# Altium PCB DAC_PCB.PcbDoc
Units mil, origin at the board's own origin, x right, y up, seen from the top; angles counter-clockwise.
Board outline 1555 x 2075 mil, 4 copper layers (Top Layer, VDD, GND, Bottom Layer), stack 23.756 mil thick; 35 components, 30 nets, 114 pads, 34 vias.
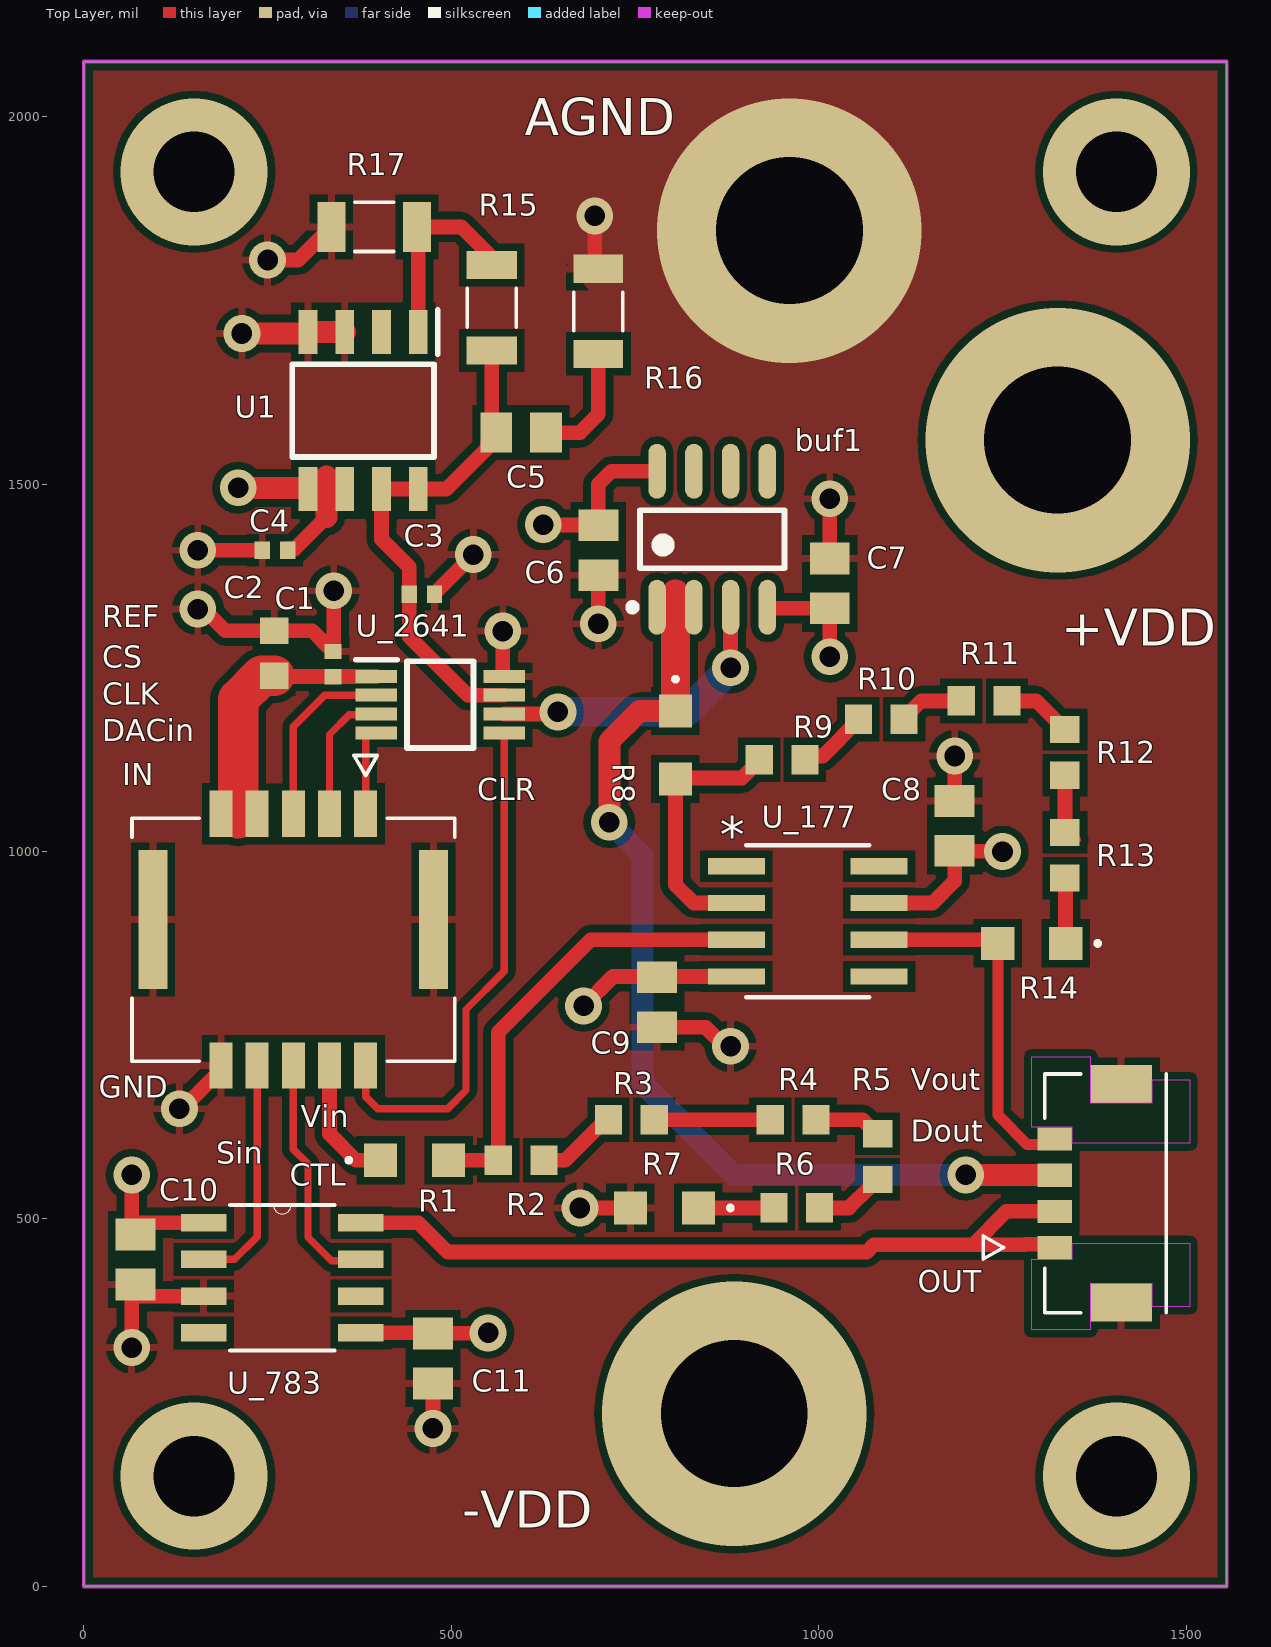
[diagram p0: Top Layer view]
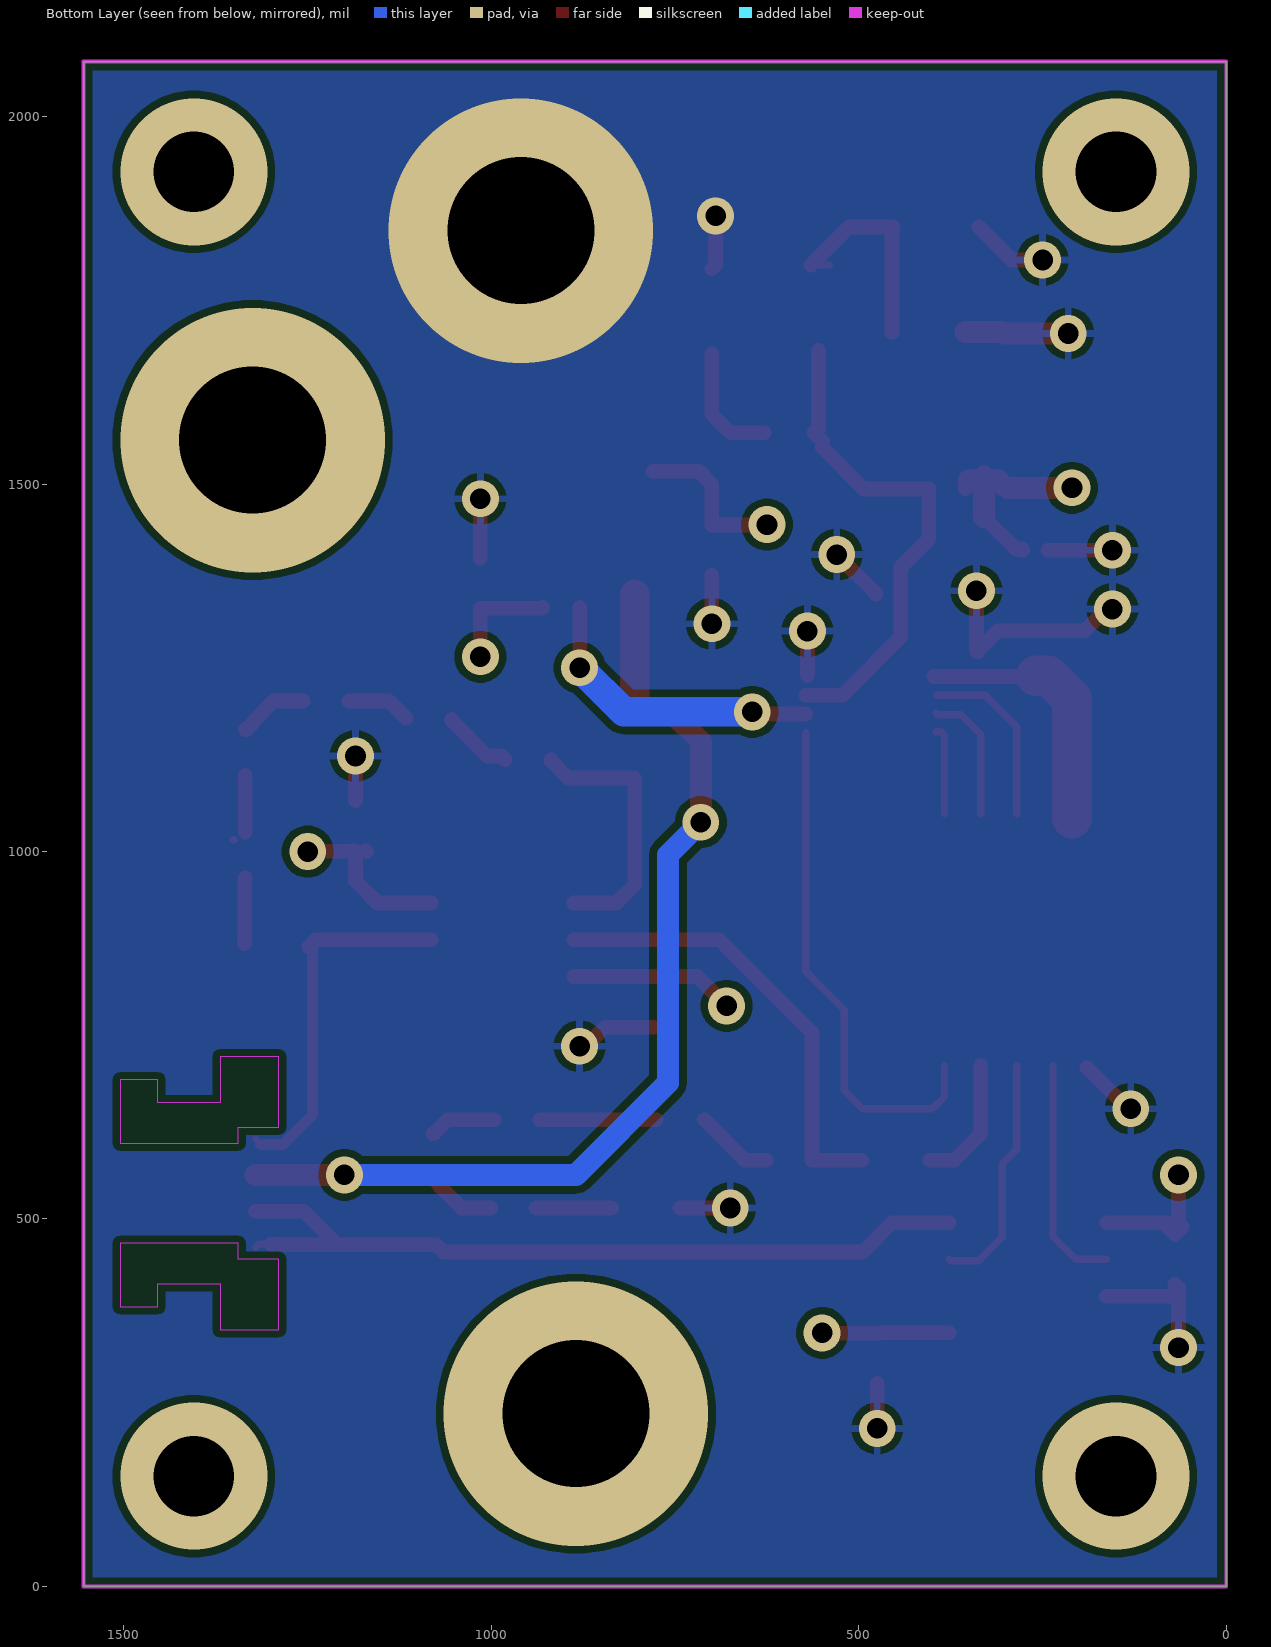
[diagram p1: Bottom Layer view, seen from below]
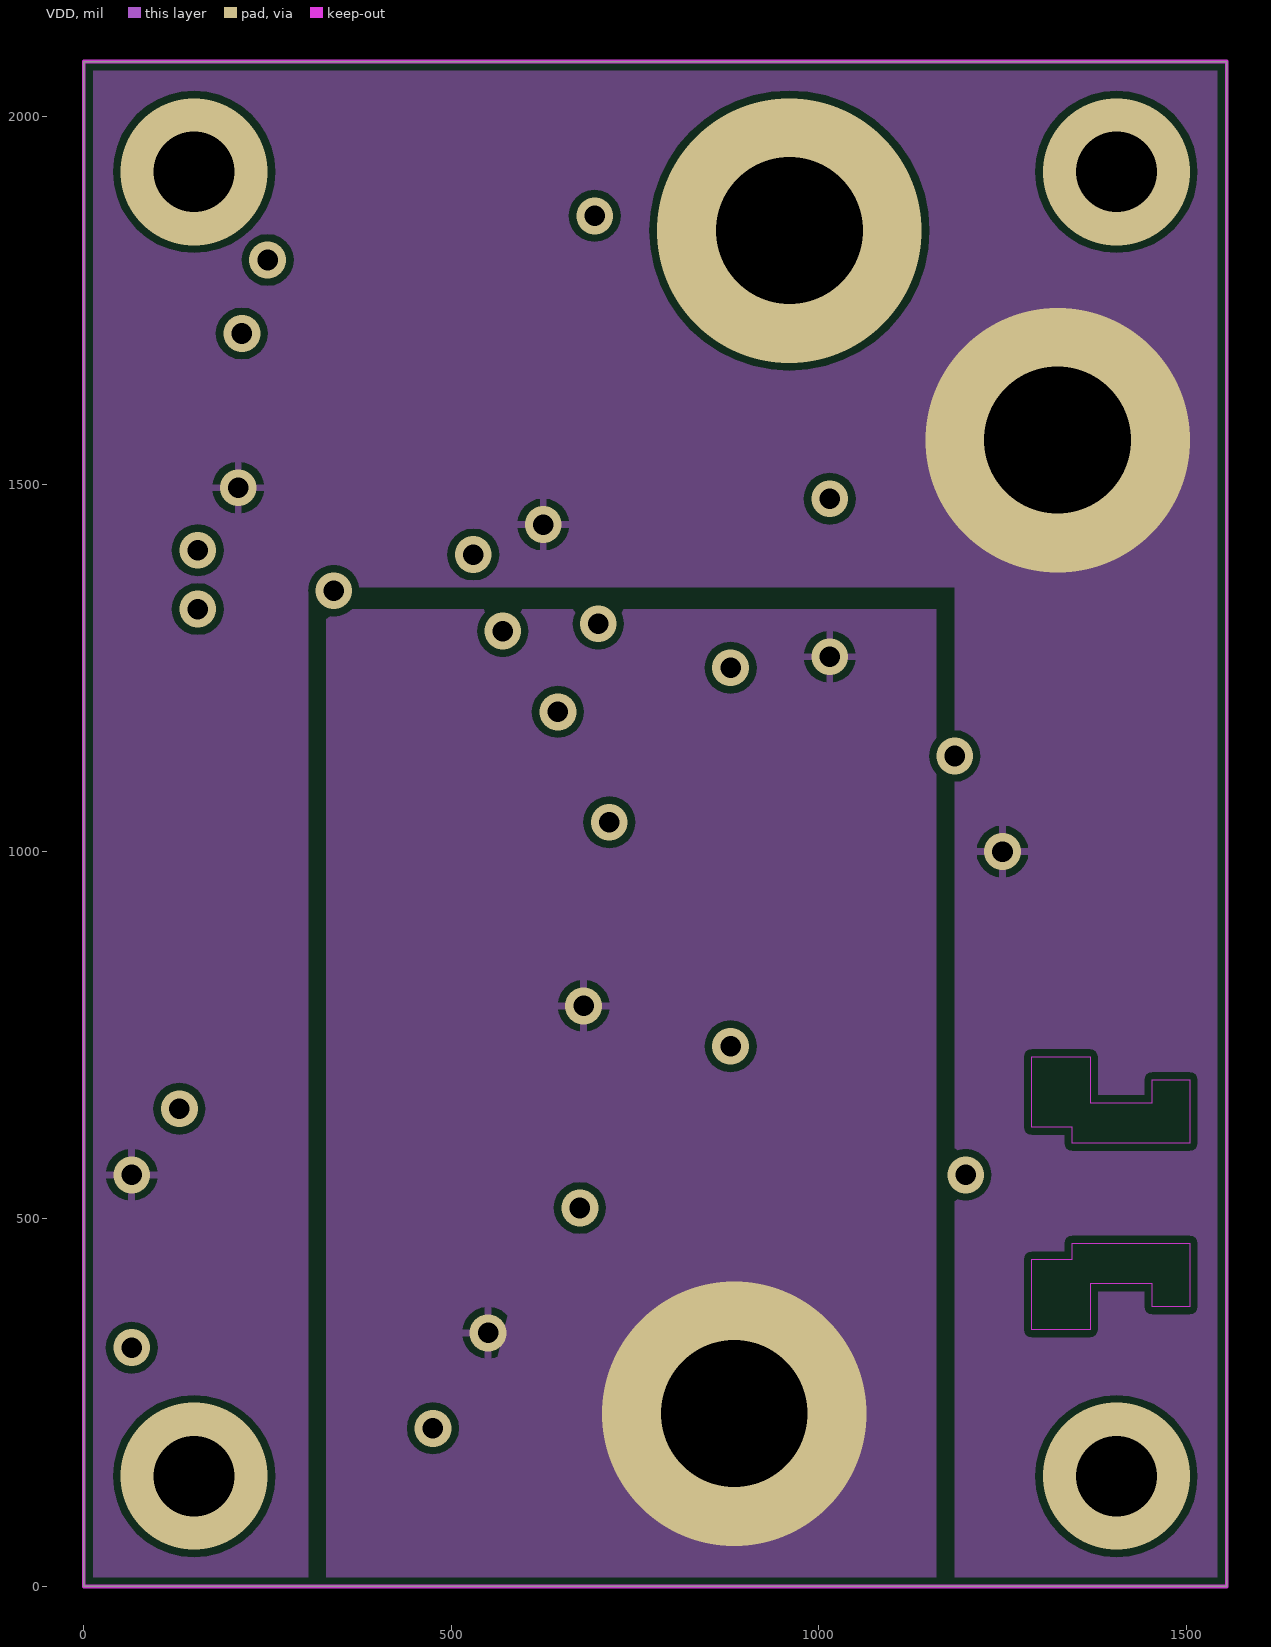
[diagram p2: VDD]
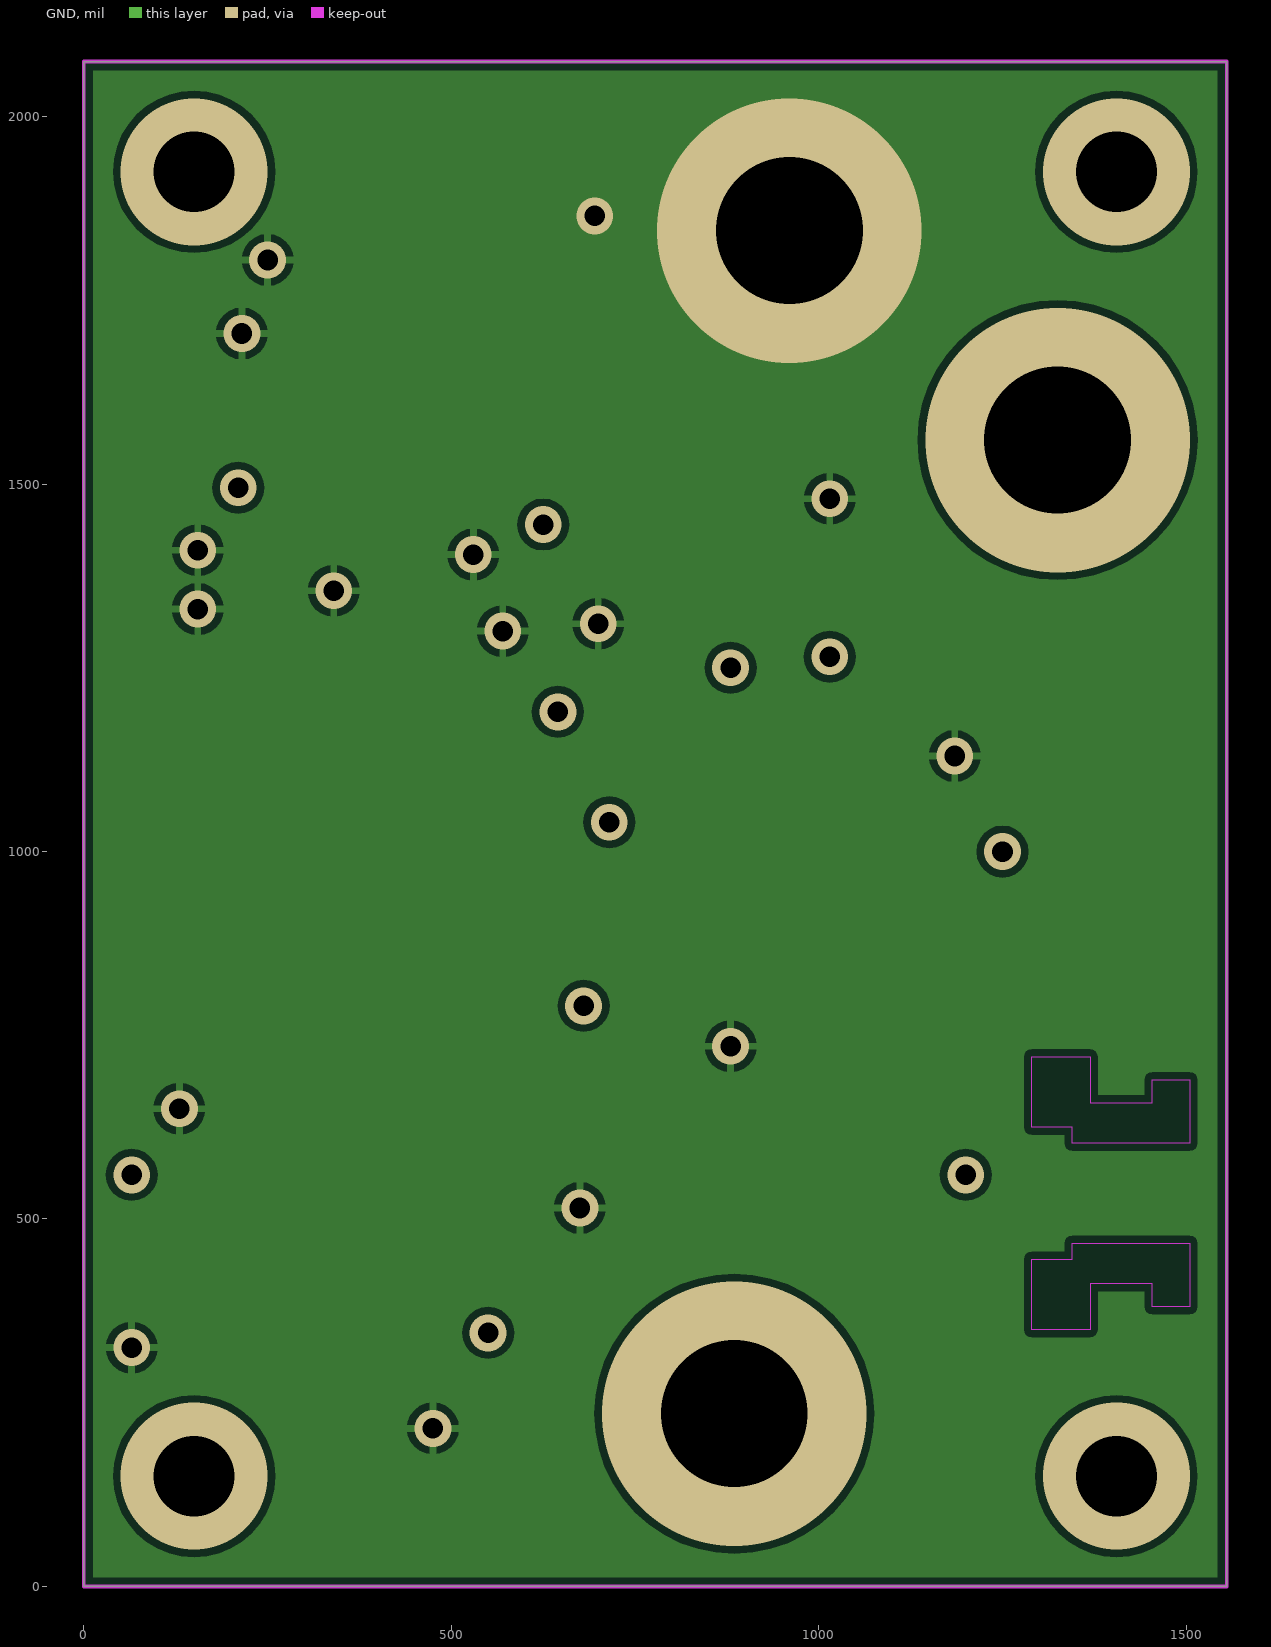
[diagram p3: GND]

## Layer stack, top to bottom
Top Solder: solder mask 1, Solder Resist, Dk 3.5
Top Layer: signal copper 1.4
Dielectric 1: prepreg 2.8, PP-006, Dk 4.1
VDD: signal copper 1.378
Dielectric 2: prepreg 12.6, FR-4, Dk 4.8
GND: signal copper 1.378
Dielectric 3: prepreg 2.8, PP-006, Dk 4.1
Bottom Layer: signal copper 1.4
Bottom Solder: solder mask 1, Solder Resist, Dk 3.5

## Board outline
0,0 1555,0 1555,2075 0,2075

## Design rules (kind name [scope] priority, off if disabled: settings)
Clearance [All] p1: gap=10 ignorepadtopadclearanceinfootprint=TRUE except(0: Arc-Hole Track-Hole SMDPad-Hole THPad-Hole Via-Hole Fill-Hole Poly-Hole Region-Hole Text-Hole; 5: Arc-Arc Arc-Track Arc-SMDPad Track-Track Track-SMDPad SMDPad-SMDPad)
PolygonConnect [All] p1: connectstyle=Relief reliefconductorwidth=10 reliefentries=4 polygonreliefangle="90 Angle" airgapwidth=10
RoutingVias [All] p1: holewidth=28 width=50 viastyle="Through Hole" minholewidth=28 minwidth=50 maxholewidth=300 maxwidth=500
SolderMaskExpansion [All] p1: expansion=4 istentingtop=FALSE
Width [All] p1: maxlimit=100 minlimit=10 preferedwidth=10
30 further rules are at their usual default settings.

## Classes and differential pairs
component class DAC_Connectors: IN OUT
component class DAC&DifferenceAmp: buf1 C1 C2 C3 C4 C5 C6 C7 C8 C9 C10 C11 R1 R2 R3 R4 R5 R6 R7 R8 R9 R10 R11 R12 R13 R14 R15 R16 R17 U1 U_177 U_783 U_2641

## Components (designator, comment, footprint, x,y, rotation, side; value= is the part's Value field where it differs from the comment)
buf1 "LT1678IS8#PBF" LT-S8-8_L 855,1425 r90 top
C1 "C1005X5R1C104K050BA" CAPC1005X55N 339,1255 r90 top
C2 "0603YD105KAT2A" CAPC1608X90N 259,1270 r90 top
C3 "C1005X5R1C104K050BA" CAPC1005X55N 460,1350 r180 top
C4 "C1005X5R1C104K050BA" CAPC1005X55N 260,1410 r180 top
C5 "CL21A475KQFNNNG" CAPC2012X135N 595,1570 r0 top
C6 "CL21A106KPFNNNG" CAPC2012X135N 700,1410 r270 top
C7 "CL21A106KPFNNNG" CAPC2012X135N 1015,1365 r90 top
C8 "CL21A106KPFNNNG" CAPC2012X135N 1185,1035 r90 top
C9 "CL21A106KPFNNNG" CAPC2012X135N 780,795 r270 top
C10 "CL21A106KPFNNNG" CAPC2012X135N 70,445 r270 top
C11 "CL21A106KPFNNNG" CAPC2012X135N 475,310 r270 top
IN "2077601081" MOLEX_2077601081 285,880 r0 top
OUT "5055670481" MOLEX_5055670481 1390,535 r270 top
R1 "ERA-6ARW102V" ERA6A_(0805) 450,580 r0 top
R2 "RG1608N-513-W-T1" RESC1608X50N 595,580 r0 top
R3 "RG1608N-513-W-T1" RESC1608X50N 745,635 r0 top
R4 "RG1608N-513-W-T1" RESC1608X50N 965,635 r0 top
R5 "RG1608N-513-W-T1" RESC1608X50N 1080,585 r270 top
R6 "RG1608N-513-W-T1" RESC1608X50N 970,515 r180 top
R7 "ERA-6ARW102V" ERA6A_(0805) 790,515 r180 top
R8 "ERA-6ARW102V" ERA6A_(0805) 805,1145 r270 top
R9 "RG1608N-513-W-T1" RESC1608X50N 950,1125 r0 top
R10 "RG1608N-513-W-T1" RESC1608X50N 1085,1180 r0 top
R11 "RG1608N-513-W-T1" RESC1608X50N 1225,1205 r0 top
R12 "RG1608N-513-W-T1" RESC1608X50N 1335,1135 r270 top
R13 "RG1608N-513-W-T1" RESC1608X50N 1335,995 r270 top
R14 "ERA-6ARW102V" ERA6A_(0805) 1290,875 r180 top
R15 "RQ73C2B523KBTD" RESC3116X75N 555,1740 r90 top
R16 "RNCF1206AKT10R0" RESC3015X65N 700,1735 r90 top
R17 "RQ73C2B169KBTD" RESC3116X75N 395,1850 r180 top
U1 "TPS76601D" SOIC127P600X175-8N 380,1600 r270 top
U_177 "OP177GSZ" R_8_ADI 985,905 r0 top
U_783 "AD783JRZ" SOIC127P600X272-8N 270,420 r0 top
U_2641 "LTC2641CMS8-16#PBF" SOP65P490X110-8N 485,1200 r0 top

## Footprints (in the part's own frame and the unit in brackets; to place one, negate y for a bottom-side part, rotate by r counter-clockwise, add the part's x,y. Pads: shape width x height; smd on the part's side, far side on the other; paste and mask are expansions set on the pad)
CAPC1005X55N [mm]
  rect 0.53x0.6 smd: 1(-0.437,0) 2(0.437,0)
CAPC1608X90N [mm]
  rect 0.92x0.98 smd: 1(-0.775,0) 2(0.775,0)
CAPC2012X135N [mm]
  rect 1.1x1.38 smd: 1(-0.863,0) 2(0.863,0)
ERA6A_(0805) [mm]
  rect 1.15x1.15 smd: 1(-1.175,0) 2(1.175,0)
  silkscreen extent -2.32,-0.05 -2.22,0.05, body extent -1,-0.63 1,0.63, height 0.5
LT-S8-8_L [mm] "SOIC, 8-Leads, Body 4.9x3.9mm, Pitch 1.27mm, IPC High Density"
  oval 1.9x0.6 smd: 1(-2.35,1.905) 2(-2.35,0.635) 3(-2.35,-0.635) 4(-2.35,-1.905) 5(2.35,-1.905) 6(2.35,-0.635) 7(2.35,0.635) 8(2.35,1.905)
  silkscreen extent -2.47,-2.5 1,2.88, body extent -2,-2.5 2,2.5, height 1.76
MOLEX_2077601081 [mm]
  rect 0.8x1.6 smd mask+0: 1(2.5,4.35) 2(2.5,-4.35) 3(1.25,4.35) 4(1.25,-4.35) 5(0,4.35) 6(0,-4.35) 7(-1.25,4.35) 8(-1.25,-4.35) 9(-2.5,4.35) 10(-2.5,-4.35)
  rect 1x4.8 smd mask+0: S1(-4.85,0.7) S2(4.85,0.7)
  silkscreen extent -5.58,-4.2 5.58,6.37
MOLEX_5055670481 [mm]
  rect 0.8x1.2 smd mask+0: 1(1.875,-1.75) 2(0.625,-1.75) 3(-0.625,-1.75) 4(-1.875,-1.75)
  rect 1.3x2.15 smd mask+0: S1(-3.775,0.545) S2(3.775,0.545)
  Keep-Out Layer region: 3.925,1.62 3.125,1.62 3.125,-0.53 4.725,-0.53 4.725,-2.55 2.275,-2.55 2.275,-1.15 1.725,-1.15 1.725,2.92 3.925,2.92
  Keep-Out Layer region: -1.725,-1.15 -2.275,-1.15 -2.275,-2.55 -4.725,-2.55 -4.725,-0.53 -3.125,-0.53 -3.125,1.62 -3.925,1.62 -3.925,2.92 -1.725,2.92
  Keep-Out Layer region: 3.925,1.62 3.125,1.62 3.125,-0.53 4.725,-0.53 4.725,-2.55 2.275,-2.55 2.275,-1.15 1.725,-1.15 1.725,2.92 3.925,2.92
  Keep-Out Layer region: -1.725,-1.15 -2.275,-1.15 -2.275,-2.55 -4.725,-2.55 -4.725,-0.53 -3.125,-0.53 -3.125,1.62 -3.925,1.62 -3.925,2.92 -1.725,2.92
  silkscreen extent -4.13,-4.22 4.13,2.1
R_8_ADI [mil]
  rect 78x22 smd paste+0 mask+0: 1(-97,75) 2(-97,25) 3(-97,-25) 4(-97,-75) 5(97,-75) 6(97,-25) 7(97,25) 8(97,75)
  silkscreen extent -84,-104 84,104, body extent -129,-143 129,143, height 71
RESC1608X50N [mm]
  rect 0.94x1.02 smd: 1(-0.79,0) 2(0.79,0)
RESC3015X65N [mm]
  rect 0.98x1.72 smd: 1(-1.47,0) 2(1.47,0)
  silkscreen extent -0.66,-0.85 0.66,0.85
RESC3116X75N [mm]
  rect 0.97x1.73 smd: 1(-1.48,0) 2(1.48,0)
  silkscreen extent -0.67,-0.85 0.67,0.85
SOIC127P600X175-8N [mm]
  rect 1.525x0.65 smd: 1(-2.712,1.905) 2(-2.712,0.635) 3(-2.712,-0.635) 4(-2.712,-1.905) 5(2.712,-1.905) 6(2.712,-0.635) 7(2.712,0.635) 8(2.712,1.905)
  silkscreen extent -3.47,-2.45 1.6,2.58, body extent -3,-2.45 3,2.45, height 1.75
SOIC127P600X272-8N [mil]
  rect 62x24 smd: 1(-107,75) 2(-107,25) 3(-107,-25) 4(-107,-75) 5(107,-75) 6(107,-25) 7(107,25) 8(107,75)
  silkscreen extent -71,-99 71,99, body extent -96,-118 96,118, height 30
SOP65P490X110-8N [mm]
  rect 1.425x0.45 smd: 1(-2.212,0.975) 2(-2.212,0.325) 3(-2.212,-0.325) 4(-2.212,-0.975) 5(2.212,-0.975) 6(2.212,-0.325) 7(2.212,0.325) 8(2.212,0.975)
  silkscreen extent -2.93,-1.5 1.15,1.55, body extent -2.45,-1.5 2.45,1.5, height 1.1

## Part data
buf1: library part CMP-0359-03474-2, "Dual Channel, Very Low 1/f Corner Frequency Precision Operational Amplifier, 20 MHz Typical GBW, 6 V/us Typical SR, 3 to 36 V, 8-Pin SOIC (S8-8), Industrial, Pb-Free", Linear Technology Part Number=LT1678, Manufacturer="Linear Technology", Channels (#)=2, ComponentLink1Description="Manufacturer URL", ComponentLink1URL=http://www.linear.com/, ComponentLink2Description=Datasheet, ComponentLink2URL=http://cds.linear.com/docs/en/datasheet/16789fs.pdf, ComponentLink3Description="Package Specification", ComponentLink3URL=http://cds.linear.com/docs/en/packaging/05081610_G_SO8.pdf, GBW (MHz) Typical=20, Is (mA) Typical=2, Mounting Technology="Surface Mount", PackageDescription="8-Pin Plastic Small Outline, Body 4.9 x 3.9 mm, Pitch 1.27 mm", PackageReference=LT-S8-8, PackageVersion="Rev G", PartNumber=LT1678IS8#PBF, RevisionNote="URLs updated", RoHS=Pb-Free, SR (V/us) Typical=6, Type=VFB, Vos (mV) Guaranteed=0.1, Vos (mV) Typical=0.035, Vs Max (V)=36, Vs Min (V)=3
C1 C3 C4: "CERAMIC CAPACITOR, 0.1UF, 16V, X5R, 10%, 0402", Package=None, Availability=Unavailable, MP=C1005X5R1C104K050BA, Price=None
C2: "1ÂµF Â±10% 16V Ceramic Capacitor X5R 0603 (1608 Metric)", Package="1608 AVX", Availability=Unavailable, DigiKey-Purchase-URL=https://snapeda.com/shop?store=DigiKey&id=270397, MF=AVX, MP=0603YD105KAT2A, Price=None, SnapEDA_Link=https://www.snapeda.com/parts/0603YD105KAT2A/AVX%20/%20Kyocera/view-part/270397/?ref=snap
C5: "4.7U 6.3V K0805 X5R", Package=None, Availability=Unavailable, MP=CL21A475KQFNNNG, Price=None
C6 C7 C8 C9 C10 C11: "10ÂµF Â±10% 10V Ceramic Capacitor X5R 0805 (2012 Metric)", Package="0805 Samsung", Arrow_Electronics-Purchase-URL=https://snapeda.com/shop?store=Arrow+Electronics&id=3598324, Digi-Key_Part_Number=1276-6456-1-ND, DigiKey-Purchase-URL=https://snapeda.com/shop?store=DigiKey&id=3598324, MF="Samsung Electro-Mechanics", Mouser-Purchase-URL=https://snapeda.com/shop?store=Mouser&id=3598324, MP=CL21A106KPFNNNG, SnapEDA_Link=https://www.snapeda.com/parts/CL21A106KPFNNNG/Samsung%20Electro-Mechanics/view-part/3598324/?ref=snap
IN: "1.25mm Pitch, Micro-Lock Plus PCB Header with Potting Capability, Dual Row, Vertical, Surface Mount, Tin-Bismuth Plating, 10 Circuits, Black", Package=None, Availability=Unavailable, MP=2077601081, Price=None
OUT: "1.25mm Pitch, Micro-Lock Plus PCB Header, Right-Angle, Surface Mount, 0.10Âµm Gold Plating, Positive Lock, 4 Circuits, Black", Package=None, Availability="In Stock", Check_prices=https://www.snapeda.com/parts/5055670481/Molex/view-part/5660370/?ref=eda, MF=Molex, MP=5055670481, Price=None, SnapEDA_Link=https://www.snapeda.com/parts/5055670481/Molex/view-part/5660370/?ref=snap
R1 R7 R8 R14: "Resistor", Manufacturer_Name=Panasonic, Datasheet Link=http://industrial.panasonic.com/cdbs/www-data/pdf/RDM0000/AOA0000C307.pdf, Height=0.6mm, Manufacturer_Part_Number=ERA-6ARW102V
R2 R3 R4 R5 R6 R9 R10 R11 R12 R13 R15 R16 R17: Package=None, Availability=Unavailable, Price=None
  R2 R3 R4 R5 R6 R9 R10 R11 R12 R13: MP=RG1608N-513-W-T1
  R15: MP=RQ73C2B523KBTD
  R16: MP=RNCF1206AKT10R0
  R17: MP=RQ73C2B169KBTD
U1: "Integrated Circuit", Manufacturer_Name="Texas Instruments", Mouser Part Number=595-TPS76601D, Datasheet Link=https://www.ti.com/lit/ds/symlink/tps766.pdf?ts=1633601131788&ref_url=https%253A%252F%252Fwww.ti.com%252Fstore%252Fti%252Fen%252Fp%252Fproduct%252F%253Fp%253DTPS76601D%2526keyMatch%253DTPS76601D%2526tisearch%253Dsearch-everything%2526usecase%253DOPN, Height=1.75mm, Manufacturer_Part_Number=TPS76601D, Mouser Price/Stock=https://www.mouser.co.uk/ProductDetail/Texas-Instruments/TPS76601D?qs=6zVL%252ByCp0mox2N1yVKwG6w%3D%3D
U_177: "No Description Available", Built_By=EMA_UL_Team, Copyright="Copyright (C) 2021 Accelerated Designs. All rights reserved", Manufacturer_Part_Number=OP177GSZ, RefDes=RefDes, SourceLibrary=Analog_2012-01-01_9, Type=DEV, Vendor="Analog Devices Inc"
U_783: "Sample and Hold Amplifier 1 Circuit 8-SOIC", Package="SOIC-8 Analog Devices", Availability=Bad, Check_prices=https://www.snapeda.com/parts/AD783JRZ/Analog%20Devices%20Inc./view-part/353069/?ref=eda, MF="Analog Devices", MP=AD783JRZ, Price=None, Purchase-URL=https://pricing.snapeda.com/search/part/AD783JRZ/?ref=eda, SnapEDA_Link=https://www.snapeda.com/parts/AD783JRZ/Analog%20Devices%20Inc./view-part/353069/?ref=snap
U_2641: "Integrated Circuit", Manufacturer_Name="Analog Devices", Mouser Part Number=584-C2641CMS8-16PBF, Arrow Part Number=LTC2641CMS8-16#PBF, Arrow Price/Stock=https://www.arrow.com/en/products/ltc2641cms8-16pbf/analog-devices, Datasheet Link=https://www.analog.com/media/en/technical-documentation/data-sheets/26412fd.pdf, Height=1.1mm, Manufacturer_Part_Number=LTC2641CMS8-16#PBF, Mouser Price/Stock=https://www.mouser.com/Search/Refine.aspx?Keyword=584-C2641CMS8-16PBF

## Via types
v1: diameter 50, hole 28, Top Layer to Bottom Layer, 27 vias
v2: diameter 200, hole 110, Top Layer to Bottom Layer, 4 vias
v3: diameter 360, hole 200, Top Layer to Bottom Layer, 3 vias

## Nets (pads, with @x,y where several pads share a name; then routed paths per layer and width w, separated by ;. In a path a pad name is that pad's centre, name@x,y a point inside that pad or via, vN(x,y) a via of type N, cw(c..) or ccw(c..) an arc to the next point about the centre after c; other vN are vias at no path point)
+VDD: buf1.8 C4.1 C6.1 C8.1 C10.1 U1.5 U1.6 U_177.7 U_783.1 | length 944.2
  Top Layer w20: v1(65,560) C10.1@65,493.98 ; C10.1@81.65,490.63 C10.1 C10.1@60,488.98 ; U_783.1 66.02,495 C10.1@65,493.98 ; C4.1 277.2,1411.38 277.64,1411.81 286.81,1411.81 330,1455 ; U1.5 305,1507.2 307.8,1510 330,1510 352.2,1510 355,1507.2 U1.6 ; v1@626.26,1446.26 v1(625,1445) 625.51,1444.49 699.49,1444.49 C6.1 700,1500 717.52,1517.52 buf1.8 ; U_177.7 1155,930 1185,960 C8.1 ; C8.1@1170,1000 C8.1@1171.02,1001.02 ; C8.1@1190.51,1001.02 1191.02,1000.51 1249.49,1000.51 v1(1250,1000) ; C10.1@60,488.98 C10.1@65,493.98 ; C10.1@60,488.98 63.35,488.98 65,490.63 C10.1@65,493.98
  Top Layer w30: v1(210,1495) U1.5@297.2,1495 ; 330,1455 330,1510
  other v3: 1325,1560
-VDD: buf1.4 C7.1 C9.1 C11.1 U_177.4 U_783.5 | length 647.7
  Top Layer w20: U_783.5 470,345 470.51,344.49 549.49,344.49 v1(550,345) ; v1(680,790) 720,830 U_177.4@883,830 ; C9.1@785,830 U_177.4 ; buf1.4 931.24,1331.24 1015,1331.24 v1(1015,1265)
  other v3: 885,235
AGND: C1.2 C2.2 C3.1 C4.2 C6.2 C7.2 C8.2 C9.2 C10.2 C11.2 IN.10 IN.S1 IN.S2 OUT.S1 OUT.S2 R7.2 R16.2 R17.2 U1.3 U1.4 U_783.3 U_2641.8 | length 1546.5
  Top Layer w10: C4.2 C4.2@242.8,1411.38 ; U1.4@303.23,1705 U1.4
  Top Layer w20: v1(65,325) C10.2@65,395 ; C10.2 65,406.02 C10.2@65,395 ; v1(130,650) 133.58,650 IN.10@189.45,705.87 ; v1(155,1330) 163.12,1330 192.61,1300.51 C2.2 310.69,1300.51 C1.2@332.19,1279.02 ; v1(155,1410) C4.2 ; U_783.3 C10.2@65,395 ; v1(250,1805) 291.73,1805 R17.2 ; C1.2@337.62,1272.2 339.57,1272.2 340,1272.64 v1(340,1355) ; v1(475,215) C11.2 ; C3.1 477.2,1351.38 v1(530,1404.17) ; U_2641.8@570,1239.53 v1(570,1300) ; v1(675,515) R7.2 ; v1(695,1865) 695,1797.87 R16.2 ; v1(700,1310) C6.2 ; C9.2 845.86,761.02 871.88,735 v1(880,735) ; C7.2 v1(1015,1480) ; C8.2 v1(1185,1130)
  Top Layer w30: v1(215,1705) U1.4@303.23,1705 ; U1.4 U1.3
  other v3: 960,1845
DAC_CLR: IN.2 U_2641.5 | length 704.2
  Top Layer w10: IN.2 383.43,666.57 400,650 495,650 520,675 520,785 572.09,837.09 U_2641.5
DACCS: IN.5 U_2641.2 | length 245.2
  Top Layer w10: IN.5 285,1170 327.8,1212.8 U_2641.2@393.78,1212.8
DACSCLK: IN.3 U_2641.3 | length 181
  Top Layer w10: IN.3 334.21,1159.21 361,1186 392.57,1186 U_2641.3@395.11,1188.54
DACVDD: C3.2 C5.1 R15.1 U1.7 U1.8 U_2641.7 | length 686.2
  Top Layer w10: C3.2@442.8,1348.62 C3.2
  Top Layer w20: C3.2@442.8,1348.62 442.8,1292.2 522.2,1212.8 U_2641.7 ; C3.2 442.8,1387.2 405,1425 U1.7 U1.8 493.23,1493.23 549.37,1549.37 549.37,1558.35 C5.1 555,1576.02 R15.1
daout: buf1.3 U_2641.6 | length 416.4
  Top Layer w20: U_2641.6 642.2,1187.2 v1(645,1190) ; v1(880,1250) buf1.3
  Bottom Layer w40: v1(645,1190) 819.79,1190 879.79,1250 v1(880,1250)
diffin: buf1.1 buf1.2 OUT.3 R8.1 | length 1362.5
  Top Layer w30: v1(715,1040) 715,1150 756.17,1191.17 804.91,1191.17 R8.1 ; v1(1200,560) 1200.2,559.8 1320.91,559.8 OUT.3
  Top Layer w40: R8.1 805,1350
  Bottom Layer w30: v1(715,1040) 760,995 760,685 885,560 v1(1200,560)
NetC1_1: C1.1 C2.1 IN.7 IN.9 U_2641.1 | length 385.9
  Top Layer w20: C2.1@260.26,1238.23 338.57,1238.23 C1.1 339.3,1238.09 397.62,1238.09 U_2641.1 ; C1.1@332.69,1238.39 347.69,1238.39 347.54,1238.23 C1.1@339.59,1238.23
  Top Layer w55: 210,1045 210,1207.27 242.22,1239.49 C2.1
NetC5_2: C5.2 R16.1 | length 163.5
  Top Layer w20: C5.2 675,1570 700,1595 R16.1
NetIN_1: IN.1 U_2641.4 | length 120.3
  Top Layer w10: IN.1 383.43,1157.76 388.62,1162.95 U_2641.4@395.11,1162.95
NetIN_4: IN.4 R1.1 | length 177.3
  Top Layer w20: IN.4 334.21,615.79 370,580 R1.1
NetIN_8: IN.8 U_783.2 | length 318.5
  Top Layer w10: U_783.2 205,445 235.79,475.79 IN.8
NetOUT_1: OUT.1 OUT.2 U_783.8 | length 1096.7
  Top Layer w10: OUT.1@1300,465.43 1316.85,465.43 OUT.1
  Top Layer w20: U_783.8 455,495 495,455 1065,455 1075,465 1210,465 ; OUT.1@1300,465.43 1281.32,465.43 1280.89,465 1210,465 ; OUT.2 1255.39,510.39 1210,465
NetOUT_4: OUT.4 R14.2 U_177.6 | length 501.4
  Top Layer w10: OUT.4@1313.93,601.64 OUT.4
  Top Layer w15: R14.2 1243.74,641.26 1283.36,601.64 OUT.4@1313.93,601.64
  Top Layer w20: U_177.6 1238.74,880 R14.2 R14.2@1248.74,870
NetR1_2: R1.2 R2.1 U_177.3 | length 617.9
  Top Layer w20: R1.2 R2.1 563.9,753.9 690,880 U_177.3
NetR2_2: R2.2 R3.1 | length 106.7
  Top Layer w20: R2.2 655,580 R3.1@710,635
NetR3_2: R3.2 R4.1 | length 157.8
  Top Layer w20: R3.2 R4.1
NetR4_2: R4.2 R5.1 | length 91.7
  Top Layer w20: R4.2 1059.53,635 1078.43,616.1 R5.1
NetR5_2: R5.2 R6.1 | length 95.9
  Top Layer w20: R6.1 1041.1,515 1069.92,543.82 1069.92,545.39 1078.43,553.9 R5.2
NetR6_2: R6.2 R7.1 | length 102.6
  Top Layer w20: R7.1 935,515 R6.2
NetR8_2: R8.2 R9.1 U_177.2 | length 363
  Top Layer w10: U_177.2@887.86,930.14 U_177.2
  Top Layer w20: U_177.2 830,930 805,955 R8.2 806.26,1100 895.47,1100 918.9,1123.43 R9.1
NetR9_2: R9.2 R10.1 | length 96.5
  Top Layer w20: R9.2 986.1,1130 1005.47,1130 1053.9,1178.43 R10.1
NetR10_2: R10.2 R11.1 | length 87.5
  Top Layer w20: R10.2@1116.1,1181.57 1139.53,1205 R11.1
NetR11_2: R11.2 R12.1 | length 95.7
  Top Layer w20: R11.2 1295.99,1205 1324.92,1176.07 1324.92,1174.61 1333.43,1166.1 R12.1@1334.88,1166.1
NetR12_2: R12.2 R13.1 | length 79.4
  Top Layer w10: R13.1@1350,1016.1 R13.1@1351.57,1016.1
  Top Layer w20: R13.1 R12.2
NetR13_2: R13.2 R14.1 | length 89.4
  Top Layer w20: R13.2 1335.63,963.27 1335.63,875.63 R14.1
NetR15_2: R15.2 R17.1 U1.1 | length 292.1
  Top Layer w10: R17.1 R17.1@455,1848.27 ; R15.2@540.04,1798.27 R15.2
  Top Layer w20: R17.1 513.31,1850 R15.2@565.04,1798.27 ; U1.1 R17.1@455,1848.27
"S&H Control": IN.6 U_783.7 | length 328
  Top Layer w10: IN.6 285,595 305,575 305,475 336.86,443.14 375.14,443.14 U_783.7
pads on no net: buf1.5 buf1.6 buf1.7 U1.2 U_177.1 U_177.5 U_177.8 U_783.4 U_783.6
copper on no net:
  other v2: 150,150 1405,150 150,1925 1405,1925

## Polygon pours and split planes (outlines as drawn)
+VDD on VDD "+VDD_L02_P009" (solid, pour order 9): 0,0 305,0 305,1360 1185,1360 1185,0 1555,0 1555,2065.89 1555,2070 1555,2075 0,2075
-VDD on VDD "-VDD_L02_P007" (solid, pour order 7): 330,0 330,1330 1160,1330 1160,0
AGND on GND "AGND_L03_P004" (solid, pour order 4): 0,2075 1555,2075 1555,0 0,0
AGND on Top Layer "AGND_L01_P006" (solid, pour order 6): 0,2075 1555,2075 1555,0 0,0
AGND on Bottom Layer "Bottom_AGND" (solid, pour order 10): 0,0 1555,0 1555,2075 0,2075

## Keep-outs
Keep-Out Layer:
  the board outline again, w5

## Silkscreen, mask and mechanical layers (free items; w line width, h text height)
Top Overlay:
  text "AGND" at 600,1975 h50
  text "REF" at 25,1305 h30
  text "+VDD" at 1330,1280 h50
  text "CS" at 25,1250 h30
  text "CLK" at 25,1200 h30
  text "DACin" at 25,1150 h30
  text "CLR" at 535,1070 h30
  text "Vout" at 1125,675 h30
  text "GND" at 20,665 h30
  text "Vin" at 295,625 h30
  text "Dout" at 1125,605 h30
  text "Sin" at 180,575 h30
  text "CTL" at 280,545 h30
  text "-VDD" at 515,80 h50

## Text inside footprints (layer, text, board x,y; h text height)
U_177: Top Overlay "*" at 865.5,997 h50; Mechanical 7 "Default Padstyle: RX78Y22D0T" at 635,606.5 h50; Mechanical 7 "Pin One Padstyle: RX78Y22D0T" at 635,546.5 h50; Mechanical 7 "Alt 1 Padstyle: OX60Y90D30P" at 647.5,366.5 h50; Mechanical 7 "Alt 2 Padstyle: OX90Y60D30P" at 647.5,306.5 h50; Mechanical 7 "0.157in/3.988mm" at 891.25,1098.5 h25; Mechanical 7 "0.244in/6.198mm" at 891.25,1173.5 h25; Mechanical 7 "0.197in/5.004mm" at 1183.5,892.5 h25; Mechanical 7 "0.05in/1.27mm" at 605.5,942.5 h25; Mechanical 7 "0.05in/1.27mm" at 806.75,686.5 h25; Mechanical 13 "*" at 909,950.5 h50